# EAGLE board ADCBreakout (EAGLE 6.5.0)
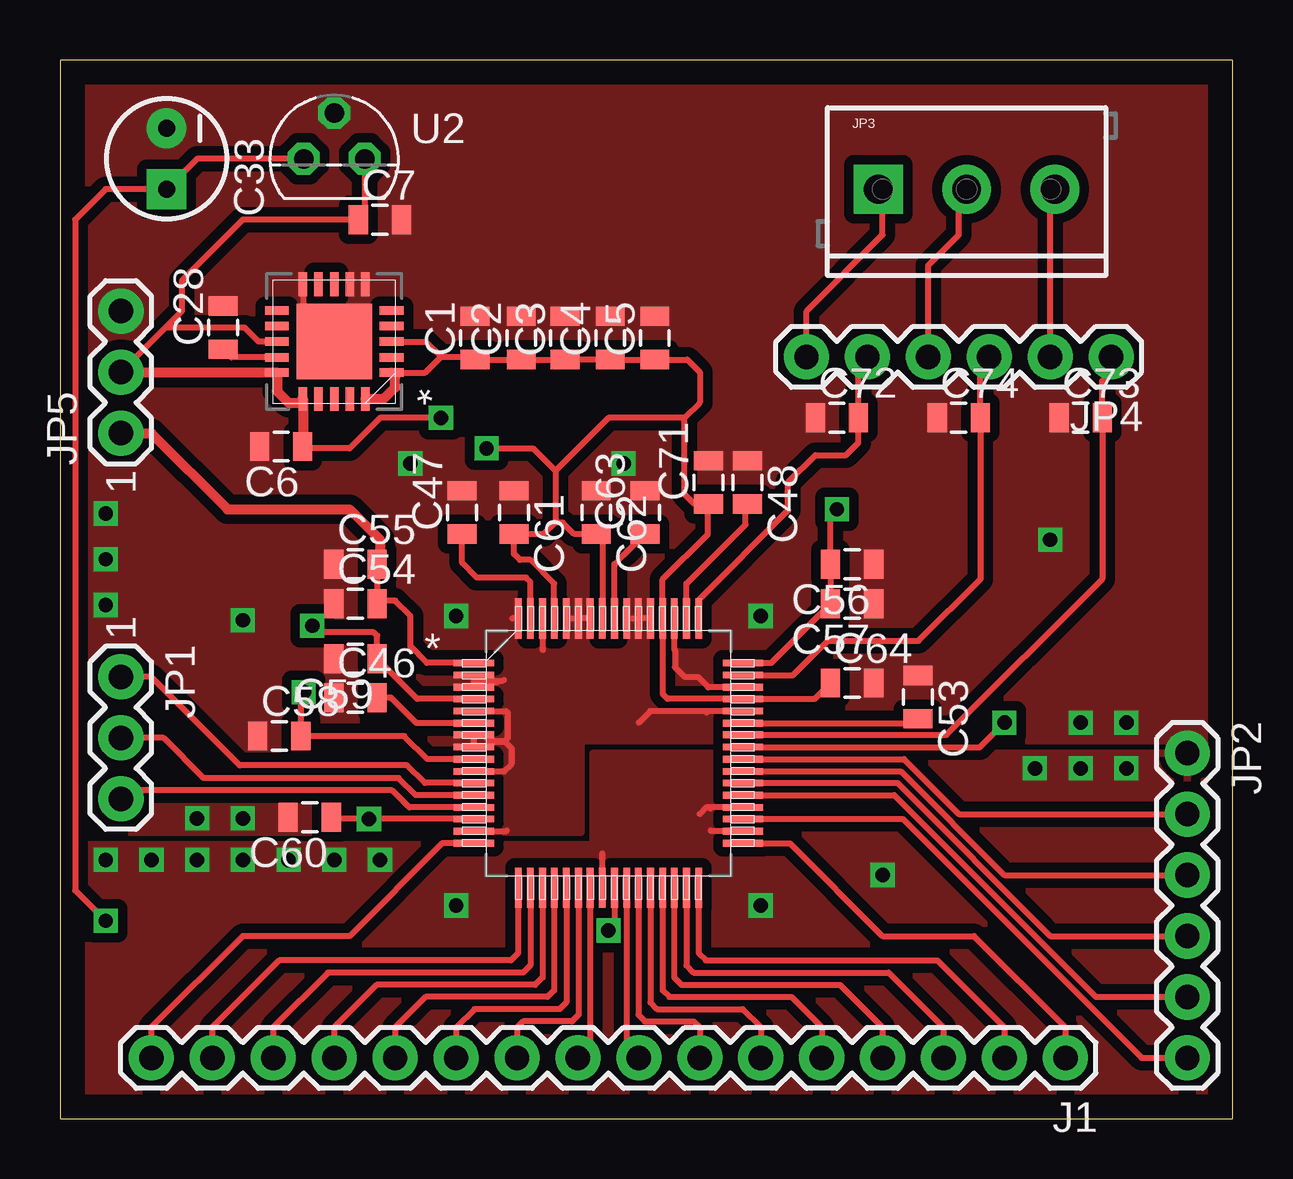
[diagram p0: board, top side]
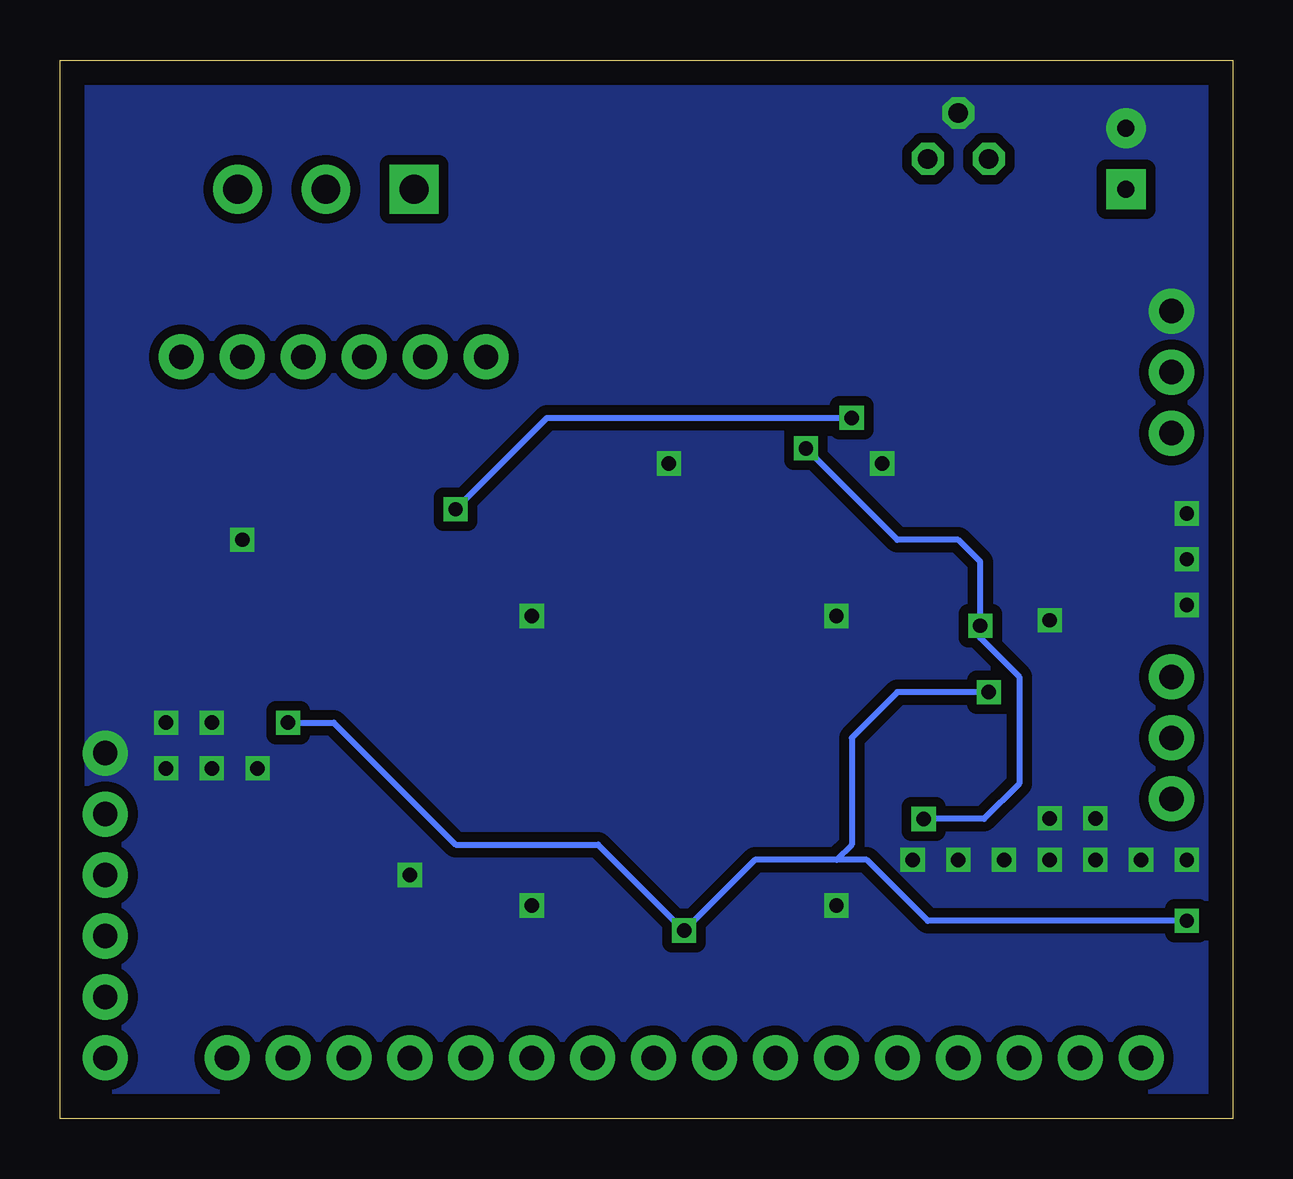
[diagram p1: board, bottom side, seen from below]

Size 48.88 x 44.12 mm. Coordinates in mm from the lower left corner, seen from the top.
Outline: 0,0 48.88,0 48.88,44.12 0,44.12 0,0
Copper layers (1*16): Top 0.035mm / dielectric 1.5mm / Bottom 0.035mm
Design rules "default": minimum track width 10mil, minimum drill 24mil, track to track 8mil, track to pad 8mil, pad to pad 8mil, via to via 8mil, smd to smd 8mil, copper to edge 40mil, drill to drill 8mil, minimum pad ring 10mil, minimum via ring 8mil, stop-mask expansion 4mil, vias tented up to drill 0mil, thermal gap 10mil

## Footprints (pad centres in the part's own frame; a part is rotated, then mirrored left to right if it is on the bottom)
0805 = smd 0.8 x 1.2: 1 -0.9,0; 2 0.9,0
CPOL-RADIAL-10UF-25V = drill 0.7 pad 1.651 square: 1 1.27,0 | drill 0.7 pad 1.651: 2 -1.27,0
1X16 = drill 1.016 pad 1.88: 1 0,0; 2 2.54,0; 3 5.08,0; 4 7.62,0; 5 10.16,0; 6 12.7,0; 7 15.24,0; 8 17.78,0; 9 20.32,0; 10 22.86,0; 11 25.4,0; 12 27.94,0; 13 30.48,0; 14 33.02,0; 15 35.56,0; 16 38.1,0
1X03 = drill 1.016 pad 1.88: 1 -2.54,0; 2 0,0; 3 2.54,0
1X06 = drill 1.016 pad 1.88: 1 -6.35,0; 2 -3.81,0; 3 -1.27,0; 4 1.27,0; 5 3.81,0; 6 6.35,0
SCREWTERMINAL-3.5MM-3_LOCK.007S = drill 1.2 pad 2.032 square: 1 -0.178,0 | drill 1.2 pad 2.032: 2 3.5,0; 3 7.178,0
PM64 = smd 1.676 x 0.279: 1 -5.613,3.759; 2 -5.613,3.251; 3 -5.613,2.743; 4 -5.613,2.261; 5 -5.613,1.753; 6 -5.613,1.245; 7 -5.613,0.762; 8 -5.613,0.254; 9 -5.613,-0.254; 10 -5.613,-0.762; 11 -5.613,-1.245; 12 -5.613,-1.753; 13 -5.613,-2.261; 14 -5.613,-2.743; 15 -5.613,-3.251; 16 -5.613,-3.759; 33 5.613,-3.759; 34 5.613,-3.251; 35 5.613,-2.743; 36 5.613,-2.261; 37 5.613,-1.753; 38 5.613,-1.245; 39 5.613,-0.762; 40 5.613,-0.254; 41 5.613,0.254; 42 5.613,0.762; 43 5.613,1.245; 44 5.613,1.753; 45 5.613,2.261; 46 5.613,2.743; 47 5.613,3.251; 48 5.613,3.759 | smd 0.279 x 1.676: 17 -3.759,-5.613; 18 -3.251,-5.613; 19 -2.743,-5.613; 20 -2.261,-5.613; 21 -1.753,-5.613; 22 -1.245,-5.613; 23 -0.762,-5.613; 24 -0.254,-5.613; 25 0.254,-5.613; 26 0.762,-5.613; 27 1.245,-5.613; 28 1.753,-5.613; 29 2.261,-5.613; 30 2.743,-5.613; 31 3.251,-5.613; 32 3.759,-5.613; 49 3.759,5.613; 50 3.251,5.613; 51 2.743,5.613; 52 2.261,5.613; 53 1.753,5.613; 54 1.245,5.613; 55 0.762,5.613; 56 0.254,5.613; 57 -0.254,5.613; 58 -0.762,5.613; 59 -1.245,5.613; 60 -1.753,5.613; 61 -2.261,5.613; 62 -2.743,5.613; 63 -3.251,5.613; 64 -3.759,5.613
TO92 = drill 0.813 octagon: 1 -1.27,0; 2 0,1.905; 3 1.27,0
RGW20_3P15X3P15 = smd 0.991 x 0.356: 1 -2.388,1.295; 2 -2.388,0.66; 3 -2.388,0; 4 -2.388,-0.66; 5 -2.388,-1.295; 11 2.388,-1.295; 12 2.388,-0.66; 13 2.388,0; 14 2.388,0.66; 15 2.388,1.295 | smd 0.356 x 0.991: 6 -1.295,-2.388; 7 -0.66,-2.388; 8 0,-2.388; 9 0.66,-2.388; 10 1.295,-2.388; 16 1.295,2.388; 17 0.66,2.388; 18 0,2.388; 19 -0.66,2.388; 20 -1.295,2.388 | smd 3.15 x 3.15: 21 0,0

## Placement (x,y rotation side)
C1  10uF  [0805]  17.3,32.54 90 top
C2  10uF  [0805]  19.23,32.54 90 top
C3  10uF  [0805]  21.06,32.54 90 top
C4  10uF  [0805]  22.94,32.54 90 top
C5  10uF  [0805]  24.79,32.54 90 top
C6  10uF  [0805]  9.22,28.02 180 top
C7  10uF  [0805]  13.34,37.47 0 top
C28  1uF  [0805]  6.81,32.97 90 top
C33  10uF  [CPOL-RADIAL-10UF-25V]  4.45,40.01 270 top
C46  10uF  [0805]  12.32,17.55 0 top
C47  10uF  [0805]  16.76,25.27 90 top
C48  10uF  [0805]  28.65,26.52 270 top
C53  10uF  [0805]  35.76,17.58 270 top
C54  10uF  [0805]  12.32,21.46 0 top
C55  .1uF  [0805]  12.32,23.11 0 top
C56  10uF  [0805]  33.02,23.11 180 top
C57  .1uF  [0805]  33.02,21.46 180 top
C58  1uF  [0805]  9.14,15.95 0 top
C59  .1uF  [0805]  12.32,19.18 180 top
C60  .1uF  [0805]  10.41,12.57 180 top
C61  .1uF  [0805]  18.92,25.27 270 top
C62  .1uF  [0805]  22.35,25.27 270 top
C63  .47uF  [0805]  24.38,25.27 90 top
C64  .1uF  [0805]  33.02,18.16 0 top
C71  .1uF  [0805]  27.03,26.52 90 top
C72  10nF  [0805]  32.38,29.21 0 top
C73  10nF  [0805]  42.55,29.21 0 top
C74  10nF  [0805]  37.47,29.21 0 top
J1  M16PTH  [1X16]  41.91,2.54 180 top
JP1  M03PTH  [1X03]  2.54,15.88 270 top
JP2  [1X06]  46.99,8.89 270 top
JP3  M03SCREW_LOCK  [SCREWTERMINAL-3.5MM-3_LOCK.007S]  34.29,38.73 0 top
JP4  [1X06]  37.47,31.75 180 top
JP5  M03PTH  [1X03]  2.54,31.11 90 top
U1  ADS8568_PM_64  [PM64]  22.86,15.24 0 top
U2  LP2950-3.3ACZ  [TO92]  11.43,40.01 0 top
U$3  TPS7A4700_RGW_20  [RGW20_3P15X3P15]  11.43,32.38 180 top

## Library data of the parts
C1-C7 C28 C33 C46-C48 C53-C64 C71-C74 U1 U$3 = SensorCape
J1 JP1-JP5 U2 = ASL

## Nets
AA1_R_OUT: C73.2 JP4.1 U1.42
AA2_R_OUT: C74.2 JP4.3 U1.47
AA3_R_OUT: C72.2 JP4.5 U1.49
ADC_DB0: J1.1 U1.33
ADC_DB1: J1.2 U1.32
ADC_DB2: J1.3 U1.31
ADC_DB3: J1.4 U1.30
ADC_DB4: J1.5 U1.29
ADC_DB5: J1.6 U1.28
ADC_DB6: J1.7 U1.27
ADC_DB7: J1.8 U1.26
ADC_DB8: J1.9 U1.23
ADC_DB9: J1.10 U1.22
ADC_DB10: J1.11 U1.21
ADC_DB11: J1.12 U1.20
ADC_DB12: J1.13 U1.19
ADC_DB13: J1.14 U1.18
ADC_DB14: J1.15 U1.17
ADC_DB15: J1.16 U1.16
BUSY: JP2.6 U1.35
CONV_A: JP2.5 U1.37
CONV_B: JP2.4 U1.38
CONV_C: JP2.3 U1.39
CONV_D: JP2.2 U1.40
CS*: JP1.3 U1.13
GND: C1.2 C2.2 C3.2 C4.2 C5.2 C6.2 C7.2 C28.2 C33.2 C46.1 C47.2 C48.1 C53.1 C54.1 C55.1 C56.1 C57.1 C58.1 C59.2 C60.2 C61.1 C62.1 C63.2 C64.2 C71.2 C72.1 C73.1 C74.1 JP2.1 JP5.3 U1.2 U1.3 U1.5 U1.7 U1.8 U1.10 U1.15 U1.24 U1.34 U1.36 U1.44 U1.46 U1.51 U1.53 U1.54 U1.55 U1.58 U1.59 U1.60 U1.62 U1.64 U2.2 U$3.6 U$3.7 U$3.10 U$3.21
HVDD_12A: C6.1 C7.1 C56.2 C57.2 JP5.2 U1.48 U2.3 U$3.13 U$3.15 U$3.16
HVSS_12A: C54.2 C55.2 JP5.1 U1.1
N$1: JP3.3 JP4.2
N$2: JP3.2 JP4.4
N$3: JP3.1 JP4.6
N$7: C63.1 U1.56
N$45: C28.1 U$3.14
N$87: C46.2 U1.6
N$93: C53.2 U1.43
N$94: C48.2 U1.50
N$96: C47.1 U1.63
RD*: JP1.2 U1.12
VDD3V3_D: C33.1 C58.2 U1.9 U1.25 U1.41 U2.1
VDD5V0_A: C1.1 C2.1 C3.1 C4.1 C5.1 C59.1 C60.1 C61.2 C62.2 C64.1 C71.1 U1.4 U1.14 U1.45 U1.52 U1.57 U1.61 U$3.1 U$3.3 U$3.20
WR*: JP1.1 U1.11

## Tracks (layer width: path | path; a pad name or v marks a point on that pad's centre or on a via)
AA1_R_OUT
  Top 0.254: JP4.1 43.81,31.11 43.45,30.75 C73.2 43.45,22.49 36.96,16 U1.42
AA2_R_OUT
  Top 0.254: U1.47 30.56,18.49 31.75,19.68 31.77,19.68 32,19.91 35.79,19.91 38.37,22.49 C74.2 38.37,31.38 JP4.3
AA3_R_OUT
  Top 0.254: JP4.5 33.28,31.38 C72.2 33.27,28.17 32.77,27.66 31.5,27.66 30.35,26.52 30.35,25.35 26.62,21.61 U1.49
ADC_DB0
  Top 0.254: J1.1 41.91,3.81 38.1,7.62 34.29,7.62 30.43,11.48 U1.33
ADC_DB1
  Top 0.254: U1.32 26.62,6.91 26.92,6.6 36.58,6.6 39.37,3.81 J1.2
ADC_DB2
  Top 0.254: U1.31 26.11,6.4 26.42,6.1 34.54,6.1 36.83,3.81 J1.3
ADC_DB3
  Top 0.254: U1.30 25.6,5.89 25.91,5.59 32.51,5.59 34.29,3.81 J1.4
ADC_DB4
  Top 0.254: U1.29 25.12,5.36 25.4,5.08 30.48,5.08 31.75,3.81 J1.5
ADC_DB5
  Top 0.254: U1.28 24.61,4.85 24.89,4.57 28.45,4.57 29.21,3.81 J1.6
ADC_DB6
  Top 0.254: U1.27 24.11,4.34 24.38,4.06 26.42,4.06 26.67,3.81 J1.7
ADC_DB7
  Top 0.254: U1.26 23.62,3.05 J1.8
ADC_DB8
  Top 0.254: U1.23 22.1,3.05 J1.9
ADC_DB9
  Top 0.254: U1.22 21.61,4.34 21.34,4.06 19.3,4.06 19.05,3.81 J1.10
ADC_DB10
  Top 0.254: U1.21 21.11,4.85 20.83,4.57 17.27,4.57 16.51,3.81 J1.11
ADC_DB11
  Top 0.254: U1.20 20.6,5.36 20.32,5.08 15.24,5.08 13.97,3.81 J1.12
ADC_DB12
  Top 0.254: U1.19 20.12,5.89 19.81,5.59 13.21,5.59 11.43,3.81 J1.13
ADC_DB13
  Top 0.254: U1.18 19.61,6.4 19.3,6.1 11.18,6.1 8.89,3.81 J1.14
ADC_DB14
  Top 0.254: U1.17 19.1,6.91 18.8,6.6 9.14,6.6 6.35,3.81 J1.15
ADC_DB15
  Top 0.254: J1.16 3.81,3.81 7.62,7.62 12.06,7.62 15.93,11.48 U1.16
BUSY
  Top 0.254: U1.35 35.13,12.5 45.09,2.54 JP2.6
CONV_A
  Top 0.254: U1.37 34.77,13.49 43.18,5.08 JP2.5
CONV_B
  Top 0.254: U1.38 34.9,13.99 41.27,7.62 JP2.4
CONV_C
  Top 0.254: U1.39 35.05,14.48 39.37,10.16 JP2.3
CONV_D
  Top 0.254: U1.40 35.18,14.99 37.47,12.7 JP2.2
CS*
  Top 0.254: U1.13 14.55,12.98 13.84,13.69 2.9,13.69 JP1.3
GND  (via drill 0.6)
  Top 0.254: U1.62 20.12,19.53 | U1.64 18.85,20.85 | 18.49,18.29 18.47,18.26 17.35,18.26 17.25,18.36 U1.2 U1.3 17.25,18.01 17.42,18.19 18.21,18.19 18.24,18.21 | U1.5 18.59,16.99 18.67,16.92 18.67,15.88 18.54,15.75 17.86,15.75 17.6,16 U1.7 U1.8 17.73,15.49 17.96,15.72 18.54,15.72 18.82,15.44 18.82,14.78 18.52,14.48 U1.10 | U1.15 18.59,11.99 18.62,12.01 | 26.95,16.94 27,16.99 U1.44 24.61,16.99 24.13,16.51 | U1.46 27.03,17.98 26.59,18.41 26.04,18.41 25.63,18.82 25.63,19.53 25.6,19.56 U1.51 | U1.34 27.15,11.99 27.13,12.01 | U1.36 27.15,12.98 | 27.15,12.98 27.1,12.93 | U1.24 22.61,11.05 | 27.15,12.98 26.95,12.98 26.67,12.7 | U1.55 U1.54 U1.53 | U$3.10 10.13,33.68 U$3.21 | U1.58 U1.59 U1.60
  other vias: 5.71,12.52 1.91,10.79 3.81,10.79 5.71,10.79 7.62,10.79 9.53,10.79 11.43,10.79 13.34,10.79 42.55,16.51 44.45,16.51 44.45,14.61 42.55,14.61 40.64,14.61 29.21,8.89 16.51,8.89 34.29,10.16 7.62,12.52 7.62,20.78 1.91,21.41 1.91,23.32 1.91,25.22 41.27,24.13 23.5,27.3 16.51,20.95 29.21,20.95 14.61,27.3
  pour Top (isolate 0.406, no thermals): 0,43.81 48.26,43.81 48.26,15.75 21.72,15.75 21.72,11.94 0,11.94
  pour Top (isolate 0.406, rank 2): 0,11.43 22.23,11.43 22.23,15.24 48.26,15.24 48.26,13.97 48.26,0 0,0
  pour Bottom (isolate 0.406, no thermals): 0,0 48.9,0 48.9,43.81 0,43.81
HVDD_12A  (via drill 0.6)
  Top 0.254: 2.54,31.09 JP5.2 4.39,32.97 | U$3.13 8.28,32.38 7.7,32.97 4.39,32.97 | U2.3 12.7,37.09 C7.1 7.62,37.47 5.08,34.92 5.08,33.66 4.39,32.97 | U1.48 29.66,19 C57.2 C56.2 32.12,25.14 v32.38,25.4 | v15.88,29.21 13.34,29.21 12.06,27.94 10.2,27.94 C6.1
  Top 0.406: JP5.2 2.56,31.09 U$3.15 9.04,30.33 9.53,29.84 9.98,29.84 U$3.16 10.13,28.03 C6.1
  Bottom 0.254: v32.38,25.4 28.57,29.21 v15.88,29.21
HVSS_12A
  Top 0.254: U1.1 15.29,19 14.61,19.68 14.61,20.95 13.97,21.59 13.35,21.59 C54.2 C55.2
  Top 0.406: JP5.1 3.81,28.57 6.99,25.4 12.06,25.4 13.34,24.13 13.34,23.23 C55.2
N$1
  Top 0.254: JP4.2 41.27,38.54 JP3.3
N$2
  Top 0.254: JP4.4 36.2,35.56 37.47,36.83 37.47,38.41 JP3.2
N$3
  Top 0.254: JP4.6 31.11,33.66 34.29,36.83 34.29,38.56 JP3.1
N$7
  Top 0.254: U1.56 23.11,23.11 23.5,23.5 23.51,23.5 C63.1
N$45
  Top 0.254: U$3.14 7.15,31.73 C28.1
N$87
  Top 0.254: U1.6 14.86,16.48 13.79,17.55 C46.2
N$93
  Top 0.254: U1.43 35.57,16.48 C53.2
N$94
  Top 0.254: U1.50 26.11,22.3 28.57,24.77 28.57,25.54 C48.2
N$96
  Top 0.254: U1.63 19.61,22.38 19.43,22.55 17.37,22.55 16.76,23.16 C47.1
RD*
  Top 0.254: U1.12 14.83,13.49 14.12,14.2 5.99,14.2 4.32,15.88 JP1.2
VDD3V3_D  (via drill 0.6)
  Top 0.254: U1.25 23.11,8.1 v22.86,7.85 | U1.9 15.32,14.99 14.35,15.95 C58.2 10.04,17.66 v10.16,17.78 | U2.1 5.71,40.01 C33.1 1.91,38.73 0.64,37.47 0.64,9.53 v1.91,8.26 | U1.41 38.35,15.49 v39.37,16.51
  Bottom 0.254: v1.91,8.26 12.7,8.26 15.24,10.79 16.51,10.79 | 16.51,10.79 19.91,10.79 v22.86,7.85 26.44,11.43 32.38,11.43 37.47,16.51 v39.37,16.51 | v10.16,17.78 13.97,17.78 15.88,15.88 15.88,11.43 16.51,10.79
VDD5V0_A  (via drill 0.6)
  Top 0.254: U1.4 14.89,17.5 C59.1 13.22,20.13 13.08,20.27 10.79,20.27 v10.52,20.55 | U1.61 20.6,22.3 19.61,23.29 19.18,23.29 18.92,23.55 C61.2 20.18,24.37 20.65,24.84 | U1.57 22.61,24.12 C62.2 22.34,24.38 21.41,24.38 20.95,24.84 20.65,24.84 | U$3.3 15.24,32.38 15.88,31.75 | U$3.1 15.21,31.09 15.88,31.75 | 15.88,31.75 16.88,31.75 C1.1 C2.1 C3.1 C4.1 C5.1 26.15,31.64 26.67,31.11 26.67,29.84 26.04,29.21 | 26.04,29.21 22.86,29.21 20.65,27 | 20.65,27 20.65,24.84 | v17.78,27.94 19.71,27.94 20.65,27 | U1.14 v12.88,12.5 11.39,12.5 C60.1 | C64.1 31.46,17.5 U1.45 25.32,17.5 25.12,17.7 U1.52 25.12,22.48 27,24.36 27,25.59 C71.1 26.45,25.62 26.04,26.04 26.04,29.21
  Top 0.406: U$3.20 13.49,30 13.97,30.48 13.97,30.94 U$3.1
  Bottom 0.254: v17.78,27.94 13.97,24.13 11.43,24.13 10.52,23.22 v10.52,20.55 10.52,20.04 8.89,18.41 8.89,13.97 10.36,12.5 v12.88,12.5
WR*
  Top 0.254: U1.11 15.21,13.99 14.48,14.73 7.49,14.73 3.81,18.41 JP1.1